# Altium PCB Y2.PcbDoc (part 2 of 2)
Units mm, origin at the board's own origin, x right, y up, seen from the top; angles counter-clockwise.
Board outline 43.44 x 34.75 mm, 4 copper layers (Top Layer, Layer 1, Layer 2, Bottom Layer), stack 1.627 mm thick; 51 components, 77 nets, 335 pads, 113 vias.
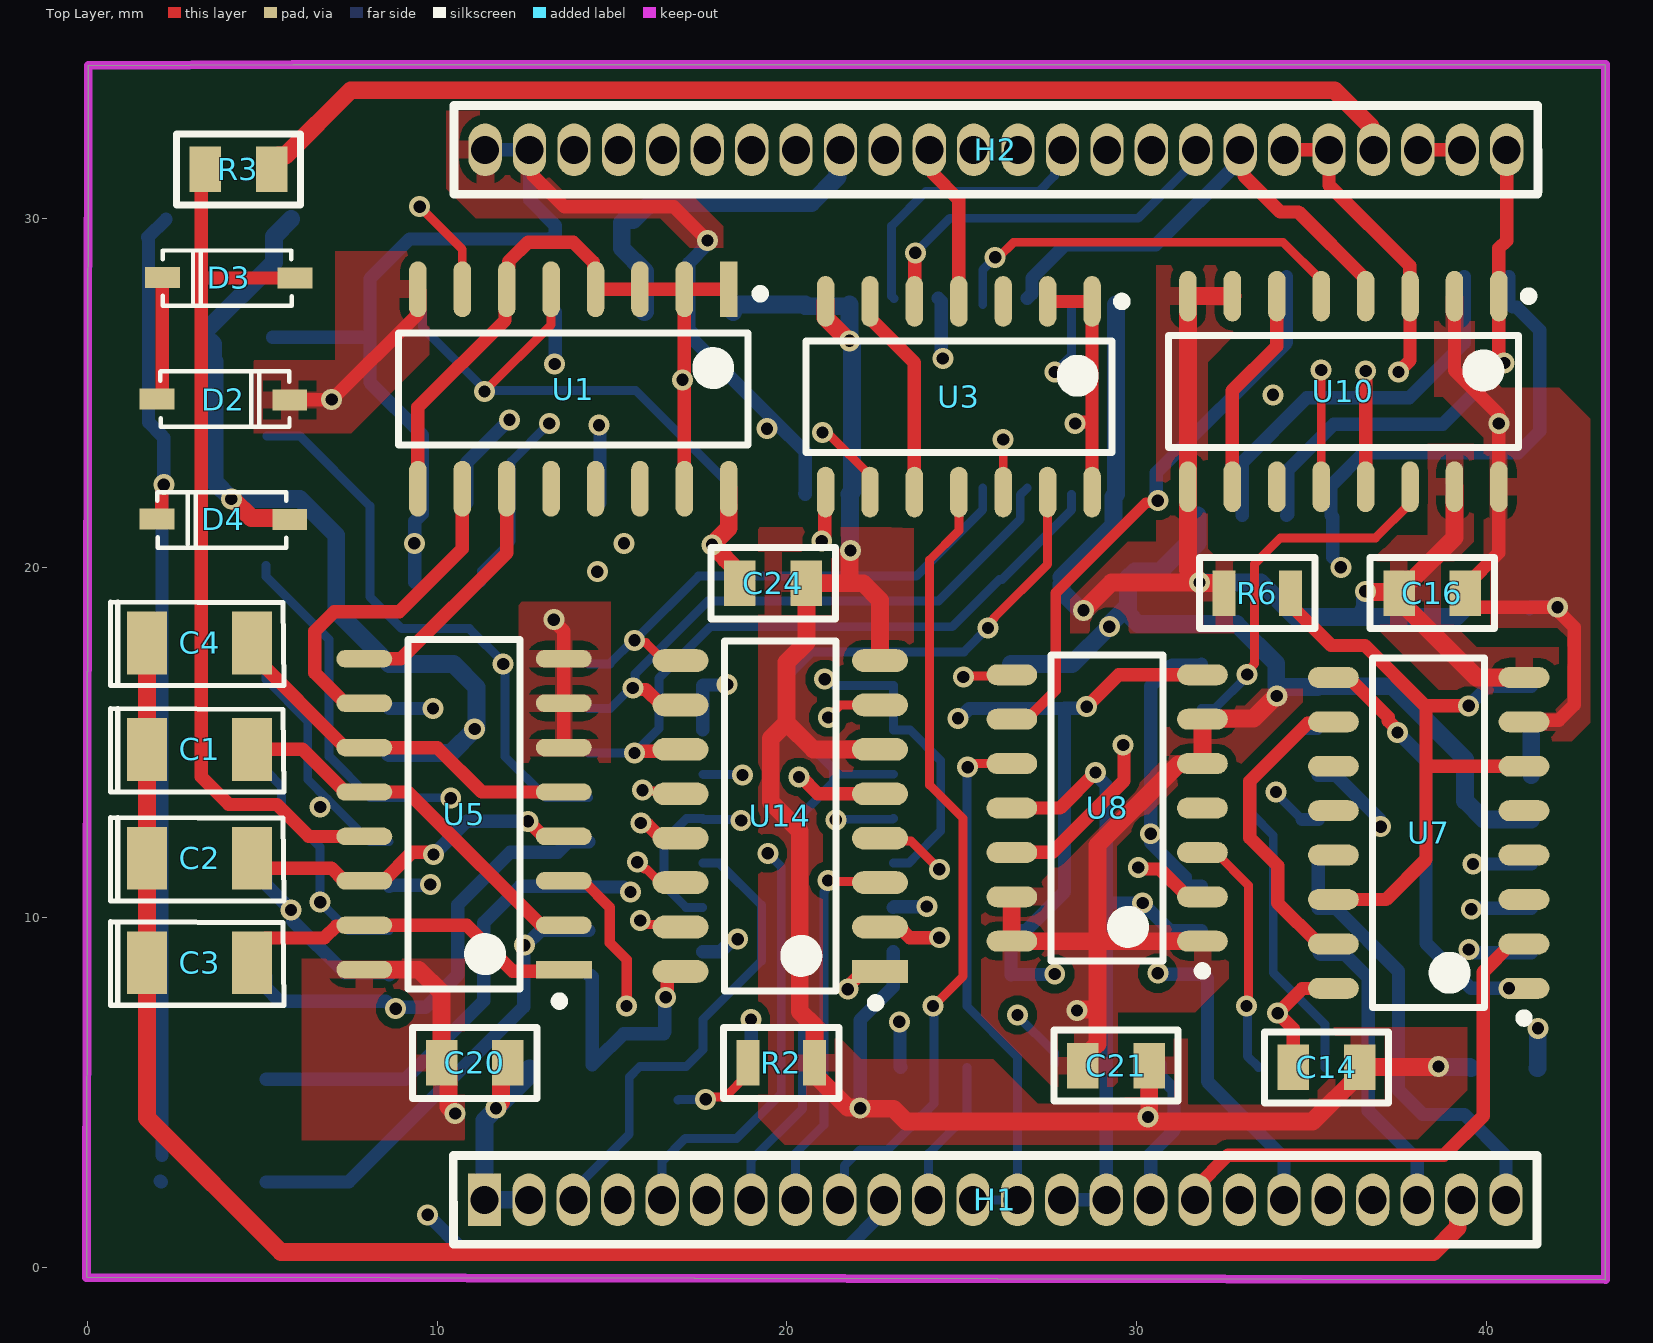
[diagram p0: Top Layer view]

## Polygon pours and split planes (outlines as drawn) (continued)
2_47 on Top Layer "2_47_L01_P018" (solid, remove dead copper, pour order 18): 10.262,33.071 10.262,33.02 10.262,30.836 11.1,29.997 16.383,29.997 17.221,29.159 18.186,29.159 18.186,29.769 17.196,30.759 13.614,30.759 13.106,31.267 13.106,33.071
+5V on Top Layer "+5V_L01_P017" (solid, remove dead copper, pour order 17): 25.552,11.049 25.552,7.188 27.584,5.156 29.337,5.156 29.464,5.283 29.464,7.29 31.674,7.29 32.639,8.255 32.639,9.779 29.566,9.779 29.439,9.906 29.439,12.04 31.344,13.945 32.537,13.945 34.747,16.154 34.747,16.535 33.579,16.535 33.096,16.053 30.81,16.053 30.81,14.58 27.28,11.049 27.254,11.049
2_1 on Top Layer "2_1_L01_P010" (solid, pour order 10): 30.556,20.752 29.743,20.752 28.067,19.075 28.067,18.136 32.791,18.136 32.791,20.371 32.207,20.371 32.029,20.549 32.029,25.883 33.147,27 33.147,28.651 30.556,28.651
2_1 on Top Layer "2_1_L01_P009" (solid, remove dead copper, pour order 9): 22.987,21.158 19.228,21.158 19.177,21.107 19.177,4.267 19.939,3.505 37.897,3.505 39.548,5.156 39.548,6.807 39.497,6.858 35.636,6.858 35.636,5.512 34.773,4.648 31.496,4.648 31.471,4.674 31.471,6.528 29.591,6.528 29.54,6.477 29.54,4.674 27.178,4.674 25.908,5.944 22.123,5.944 21.031,7.036 21.031,13.818 21.488,14.275 21.59,14.173 23.52,14.173 23.622,14.275 23.622,21.133

## Keep-outs
Keep-Out Layer:
  the board outline again, w0.254